# Altium PCB Adafruit BNO055.PcbDoc
Units mil, origin at the board's own origin, x right, y up, seen from the top; angles counter-clockwise.
Board outline 1050 x 800 mil, 2 copper layers (Top, Bottom); 31 components, 16 nets, 89 pads, 15 vias.
Unrouted connection lines stored in the file: 1.
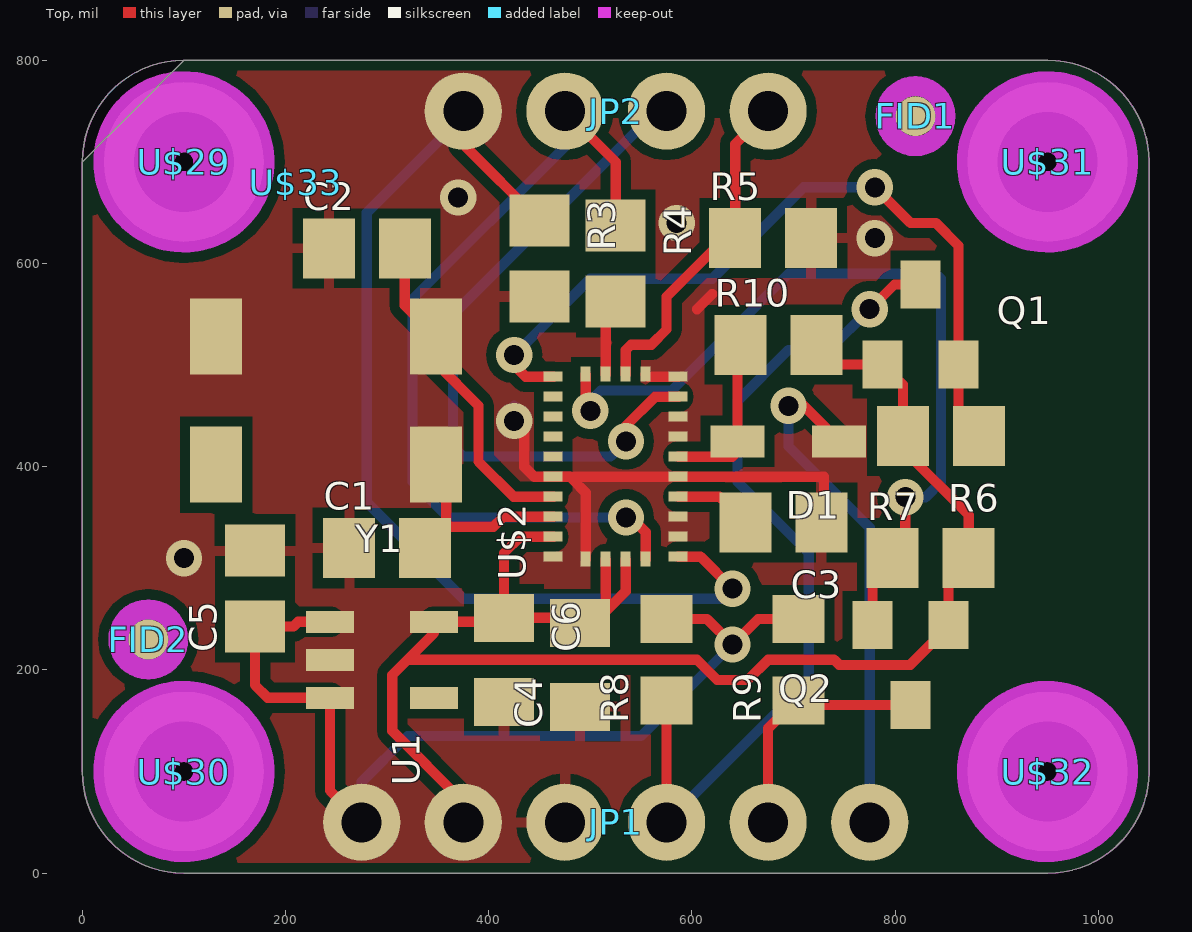
[diagram p0: Top view]
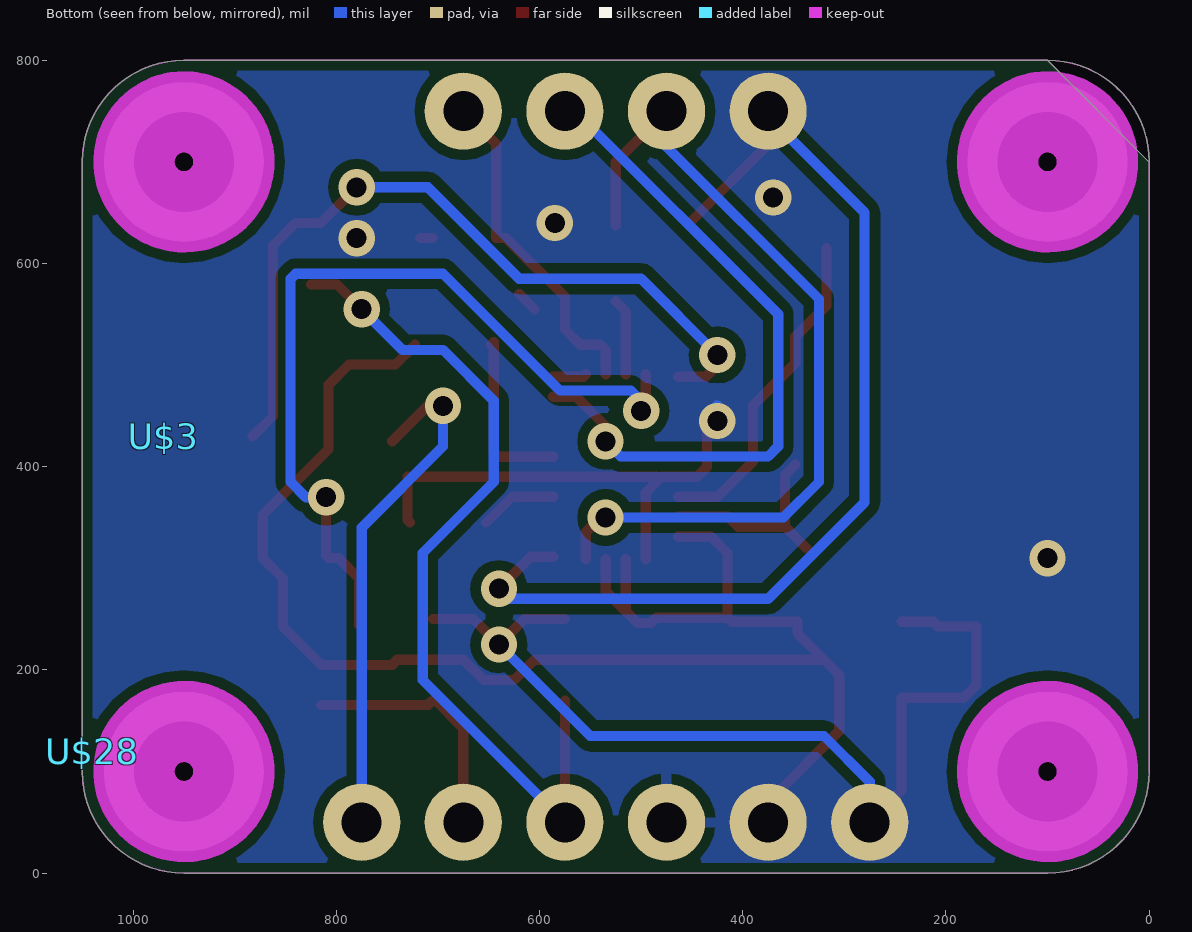
[diagram p1: Bottom view, seen from below]

## Layer stack, top to bottom
Top Solder: solder mask 0.4, Solder Resist, Dk 3.5
Top: signal copper 1.378
Dielectric 1: dielectric 12.6, FR-4, Dk 4.8
Bottom: signal copper 1.378
Bottom Solder: solder mask 0.4, Solder Resist, Dk 3.5

## Board outline
0,700 cw(c100,700) 100,800 950,800 cw(c950,700) 1050,700 1050,100 cw(c950,100) 950,0 100,0 cw(c100,100) 0,100 0,700 cw(c100,700)

## Design rules (kind name [scope] priority, off if disabled: settings)
BoardOutlineClearance mdCopperDimension [All] p1: gap=10 ignorepadtopadclearanceinfootprint=FALSE except(0: Arc-SplitContinuation Track-SplitContinuation SMDPad-SplitContinuation THPad-SplitContinuation Via-SplitContinuation Fill-SplitContinuation Poly-SplitContinuation Region-SplitContinuation Text-SplitContinuation)
Clearance Clearance_for_PolygonClass_Isolate_10 [InPolygonClass('Isolate_10') vs IsArc Or IsTrack Or IsPad Or IsVia Or IsFill Or IsRegion Or IsText] p1: gap=10 ignorepadtopadclearanceinfootprint=FALSE
Clearance "Clearance (Same Net)" [All] p2: gap=8 ignorepadtopadclearanceinfootprint=FALSE
Clearance [All] p3: gap=8 ignorepadtopadclearanceinfootprint=FALSE
HoleSize [All] p1: absolutevalues=TRUE maxlimit=100000 minlimit=15.5 maxpercent=80.000 minpercent=20.000
HoleToHoleClearance mdDrill [All] p1: gap=8 allowstackedmicrovias=TRUE
MinimumSolderMaskSliver [All] p1 off: minsoldermaskwidth=10
PasteMaskExpansion Expansion_SMDPaste_OFF [InPadClass('SMDPaste_OFF')] p1: expansion=0
PasteMaskExpansion mlMinCreamFrame [All] p2: expansion=0
PolygonConnect PolygonConnect_For_PolygonThermal_ON_Width100000_Gap100000 [InPolygonClass('PolygonThermal_ON_Width100000_Gap100000') vs Not IsVia] p1: connectstyle=Relief reliefconductorwidth=10 reliefentries=4 polygonreliefangle="90 Angle" airgapwidth=10
PolygonConnect ThermalVias [IsVia] p2: connectstyle=Direct reliefconductorwidth=10 reliefentries=4 polygonreliefangle="90 Angle" airgapwidth=10
PolygonConnect [All] p3: connectstyle=Relief reliefconductorwidth=10 reliefentries=4 polygonreliefangle="90 Angle" airgapwidth=10
RoutingVias [All] p1: holewidth=15.5 width=31.5 viastyle="Through Hole" minholewidth=15.5 minwidth=31.5 maxholewidth=100 maxwidth=100
SolderMaskExpansion mlMinStopFrame [All] p1: expansion=2 istentingtop=FALSE
Width [All] p1: maxlimit=10000 minlimit=8 preferedwidth=8
26 further rules are at their usual default settings.

## Classes and differential pairs
polygon class PolygonThermal_ON_Width100000_Gap100000: Polygon_1_Net_GND Polygon_2_Net_GND
polygon class Isolate_10: Polygon_1_Net_GND Polygon_2_Net_GND
pad class SMDPaste_OFF: FID1-1 FID2-1

## Components (designator, comment, footprint, x,y, rotation, side; value= is the part's Value field where it differs from the comment)
C1 "22pF" 0805-NO 300,320 r0 top
C2 "22pF" 0805-NO 280,615 r0 top
C3 "0.1uF" 0805-NO 690,345 r180 top
C4 "0.1uF" 0805_10MGAP 490,205 r90 top
C5 "10uF" 0805-NO 170,280 r90 top
C6 "10uF" 0805_10MGAP 415,210 r270 top
D1 "1n4148" SOD-323 695,425 r180 top
FID1 "" FIDUCIAL_1MM 820,745 r0 top
FID2 "" FIDUCIAL_1MM 65,230 r0 top
JP1 "" 1X06_ROUND_76 525,50 r0 top
JP2 "" 1X04_ROUND_76 525,750 r0 top
Q1 "BSS138" SOT23-WIDE 825,540 r0 top
Q2 "BSS138" SOT23-WIDE 815,205 r180 top
R3 "10K" 0805-NO 450,605 r270 top
R4 "10K" 0805-NO 525,600 r270 top
R5 "10K" 0805-NO 680,625 r0 top
R6 "10K" 0805-NO 845,430 r180 top
R7 "10K" 0805-NO 835,310 r0 top
R8 "10K" _0805MP 575,210 r90 top
R9 "10K" _0805MP 705,210 r90 top
R10 "10K" 0805-NO 685,520 r0 top
U1 "MIC5225-3.3" SOT23-5 295,210 r270 top
U$2 "BNO055" BNO055 525,400 r90 top
U$3 "" PCBFEAT-REV-040 970,430 r180 bottom
U$28 "" ADAFRUIT_TEXT_20MM 1040,120 r180 bottom
U$29 "" MOUNTINGHOLE_2.5_PLATED_THICK 100,700 r0 top
U$30 "" MOUNTINGHOLE_2.5_PLATED_THICK 100,100 r0 top
U$31 "" MOUNTINGHOLE_2.5_PLATED_THICK 950,700 r0 top
U$32 "" MOUNTINGHOLE_2.5_PLATED_THICK 950,100 r0 top
U$33 "" ADAFRUIT_2.5MM 210,680 r0 top
Y1 "32.768kHz" CRYSTAL_8X3.8 240,465 r180 top

## Footprints (in the part's own frame and the unit in brackets; to place one, negate y for a bottom-side part, rotate by r counter-clockwise, add the part's x,y. Pads: shape width x height; smd on the part's side, far side on the other; paste and mask are expansions set on the pad)
1X04_ROUND_76 [mil] "1X04_ROUND_76"
  round 76 hole 39.37: 1(-150,0) 2(-50,0) 3(50,0) 4(150,0)
1X06_ROUND_76 [mil] "1X06_ROUND_76"
  round 76 hole 39.37: 1(-250,0) 2(-150,0) 3(-50,0) 4(50,0) 5(150,0) 6(250,0)
0805-NO [mil] "0805-NO"
  rect 51.18x59.06 smd: 1(-37.4,0) 2(37.4,0)
0805_10MGAP [mil] "0805_10MGAP"
  rect 47.24x59.06 smd: 1(-41.34,0) 2(41.34,0)
_0805MP [mil] "_0805MP"
  rect 47.24x51.18 smd: 1(-40,0) 2(40,0)
ADAFRUIT_2.5MM [mil] "ADAFRUIT_2.5MM"
ADAFRUIT_TEXT_20MM [mil] "ADAFRUIT_TEXT_20MM"
BNO055 [mil] "BNO055"
  rect 9.84x18.7 smd: 1(-88.58,61.52) 6(-88.58,-61.52) 7(-68.9,-61.52) 8(-49.21,-61.52) 9(-29.53,-61.52) 10(-9.84,-61.52) 11(9.84,-61.52) 12(29.53,-61.52) 13(49.21,-61.52) 14(68.9,-61.52) 15(88.58,-61.52) 20(88.58,61.52) 21(68.9,61.52) 22(49.21,61.52) 23(29.53,61.52) 24(9.84,61.52) 25(-9.84,61.52) 26(-29.53,61.52) 27(-49.21,61.52) 28(-68.9,61.52)
  rect 14.76x9.84 smd: 2(-91.04,29.53) 3(-91.04,9.84) 4(-91.04,-9.84) 5(-91.04,-29.53) 16(91.04,-29.53) 17(91.04,-9.84) 18(91.04,9.84) 19(91.04,29.53)
CRYSTAL_8X3.8 [mil] "CRYSTAL_8X3.8"
  rect 51.18x74.8 smd: P$1(-108.27,-62.99) P$2(108.27,-62.99) P$3(108.27,62.99) P$4(-108.27,62.99)
FIDUCIAL_1MM [mm] "FIDUCIAL_1MM"
  rrect100% 1x1 smd paste+0: 1(0,0)
  Top keep-out lines w0.5: -0.75,0 ccw(c0,0) 0,-0.75 ; -0.75,0 cw(c0,0) 0,0.75 ; -0.75,0 ccw(c0,0) 0,-0.75 ; -0.75,0 cw(c0,0) 0,0.75 ; 0,-0.75 ccw(c0,0) 0.75,0 ; 0,-0.75 ccw(c0,0) 0.75,0 ; 0,0.75 cw(c0,0) 0.75,0 ; 0,0.75 cw(c0,0) 0.75,0
MOUNTINGHOLE_2.5_PLATED_THICK [mm] "MOUNTINGHOLE_2.5_PLATED_THICK"
  round 4 hole 2.5: P$1(0,0)
  Top keep-out circle w2.032: c0,0 r1.25
  Top keep-out circle w2.032: c0,0 r1.25
  Bottom keep-out circle w2.032: c0,0 r1.25
  Bottom keep-out circle w2.032: c0,0 r1.25
PCBFEAT-REV-040 [mil] "PCBFEAT-REV-040"
SOD-323 [mil] "SOD-323"
  rect 53.15x31.5 smd: A(50,0) C(-50,0)
SOT23-5 [mil] "SOT23-5"
  rect 21.65x47.24 smd: 1(-37.4,-51.19) 2(0,-51.19) 3(37.4,-51.19) 4(37.4,51.19) 5(-37.4,51.19)
SOT23-WIDE [mm] "SOT23-WIDE"
  rect 1x1.2 smd: 1(-0.95,-1) 2(0.95,-1) 3(0,1)

## Part data
C1 C2 C3 C5 R3 R4 R5 R6 R7 R10: library part 0805-NO, PackageName=0805-NO
C4 C6: library part 0805_10MGAP, PackageName=0805_10MGAP
D1: library part SOD-323, PackageName=SOD-323
FID1 FID2: library part FIDUCIAL_1MM, PackageName=FIDUCIAL_1MM
JP1: library part 1X06_ROUND_76, PackageName=1X06_ROUND_76
JP2: library part 1X04_ROUND_76, PackageName=1X04_ROUND_76
Q1 Q2: library part SOT23-WIDE, PackageName=SOT23-WIDE
R8 R9: library part _0805MP, PackageName=_0805MP
U1: library part SOT23-5, PackageName=SOT23-5
U$3: library part PCBFEAT-REV-040, PackageName=PCBFEAT-REV-040
U$28: library part ADAFRUIT_TEXT_20MM, PackageName=ADAFRUIT_TEXT_20MM
U$29 U$30 U$31 U$32: library part MOUNTINGHOLE_2.5_PLATED_THICK, PackageName=MOUNTINGHOLE_2.5_PLATED_THICK
U$33: library part ADAFRUIT_2.5MM, PackageName=ADAFRUIT_2.5MM
Y1: library part CRYSTAL_8X3.8, PackageName=CRYSTAL_8X3.8
U$2: PackageName=BNO055

## Via types
v1: diameter 35.69/35.69 (per signal layer), hole 19.69, Top to Bottom, 15 vias

## Nets (pads, with @x,y where several pads share a name; then routed paths per layer and width w, separated by ;. In a path a pad name is that pad's centre, name@x,y a point inside that pad or via, vN(x,y) a via of type N, cw(c..) or ccw(c..) an arc to the next point about the centre after c; other vN are vias at no path point)
3.3V: C4.2 C6.1 JP1.2 Q1.1 Q2.1 R6.2 R7.2 R10.2 U1.5 U$2.3 U$2.4 U$2.28 | length 1598.7
  Top w10: JP1.2 375,70 305,140 305,195 320,210 ; U$2.28 431.1,331.1 415,315 C6.1 ; U$2.3 C4.2@515.16,257.72 ; U$2.4 534.84,277.4 C4.2@515.16,257.72 ; R10.2 741.77,500.63 Q1.1 807.6,480.63 R6.2 807.6,417.4 872.4,352.6 R7.2 ; R7.2@867.4,305 R7.2 ; 320,210 605,210 625,190 655,190 675,210 740,210 745,205 815,205 852.4,242.4 Q2.1 852.4,290 R7.2 ; 320,210 346.19,236.19 U1.5 411.06,247.4 C6.1 ; C6.1 485,251.34 C4.2 503.78,246.34 C4.2@515.16,257.72
5.0V: C5.1 JP1.1 R8.2 R9.2 U1.1 U1.3 | length 959.5
  Top w10: U1.1 212.4,247.4 207.6,242.6 C5.1 170,185 182.4,172.6 U1.3 243.82,81.19 JP1.1 ; R8.2 615,250 v1(640,225) 665,250 R9.2
  Bottom w10: JP1.1 275,90 320,135 550,135 v1(640,225)
GND: C1.1 C2.1 C3.1 C4.1 C5.2 C6.2 JP1.3 R3.2 R4.2 R5.2 U1.2 U$2.2 U$2.10 U$2.15 U$2.16 U$2.18 U$2.25 | length 620.7
  Top w10: v1@435,440 435,400 444.84,390.16 U$2.25 479.84,390.16 482.5,387.5 ; U$2.2 495.47,374.53 482.5,387.5 ; U$2.18 515.16,552.76 R4.2 ; U$2.16 556.99,488.58 U$2.15 ; 605,555 620,570 ; R5.2@705,625 R5.2 ; C3.1 730,347.6 730,390 729.84,390.16 U$2.10 485.16,390.16 482.5,387.5
  Bottom w10: v1@425,460 v1@430,455
  other v1: 100,310 425,445 780,625 585,640 370,665
I2CADDR_3V: JP2.4 R5.1 U$2.17 | length 334.6
  Top w10: U$2.17 534.84,514.84 540,520 560,520 575,535 575,567.4 632.6,625 R5.1 642.6,717.6 JP2.4
INT_3V: JP2.3 U$2.14 | length 681.7
  Top w10: v1(535,425) 535,440 563.9,468.9 U$2.14
  Bottom w10: v1(535,425) 520,410 375,410 365,420 365,550 565,750 JP2.3
N$1: C1.2 U$2.27 Y1.P$4 | length 204.1
  Top w10: C1.2 C1.2@358.27,340.87 ; Y1.P$4 358.27,392.01 C1.2@358.27,340.87 ; U$2.27 414.49,350.79 404.57,340.87 C1.2@358.27,340.87
N$2: C2.2 U$2.26 Y1.P$1 | length 327.9
  Top w10: C2.2 317.4,558.86 Y1.P$1 348.27,501.73 390,460 390,405 424.53,370.47 U$2.26
N$3: C3.2 U$2.9 | length 76.6
  Top w10: U$2.9 627.13,370.47 C3.2
NRESET_3V: D1.A R10.1 U$2.11 | length 171.9
  Top w10: U$2.11 639.84,409.84 645,415 D1.A 645,522.6 R10.1
PS0_3V: JP2.1 R3.1 U$2.6 | length 1033
  Top w10: JP2.1 375,717.4 R3.1 ; U$2.6 608.58,311.42 v1(640,280)
  Bottom w10: JP2.1 375,745 280,650 280,365 375,270 630,270 v1(640,280)
PS1_3V: JP2.2 R4.1 U$2.5 | length 837
  Top w10: JP2.2 525,700 R4.1 ; v1(535,350) 540,350 554.53,335.47 U$2.5
  Bottom w10: JP2.2 475,715 325,565 325,385 360,350 v1(535,350)
RST_5V: D1.C JP1.6 | length 507.6
  Top w10: v1(695,460) 710,460 D1.C
  Bottom w10: v1(695,460) 695,420 775,340 JP1.6
SCL_3V: Q2.2 R7.1 U$2.19 | length 832.8
  Top w10: U$2.19 495.47,459.53 v1(500,455) ; Q2.2 777.6,290 R7.1 807.4,310 810,312.6 v1(810,370)
  Bottom w10: v1(500,455) 500,465 510,475 580,475 695,590 840,590 845,585 845,385 830,370 v1(810,370)
SCL_5V: JP1.5 Q2.3 R9.1 | length 245.8
  Top w10: JP1.5 675,142.6 702.4,170 R9.1 709.37,165.63 Q2.3
SDA_3V: Q1.2 R6.1 U$2.20 | length 778.6
  Top w10: v1(425,510) 425,500 436.42,488.58 U$2.20 ; v1(780,675) 815,640 840,640 862.4,617.6 Q1.2 862.4,450 R6.1
  Bottom w10: v1(425,510) 500,585 620,585 710,675 v1(780,675)
SDA_5V: JP1.4 Q1.3 R8.1 | length 849.4
  Top w10: JP1.4 R8.1 ; v1(775,555) 799.37,579.37 Q1.3
  Bottom w10: JP1.4 715,190 715,315 645,385 645,465 695,515 735,515 v1(775,555)
pads on no net: FID1.1 FID2.1 U1.4 U$2.1 U$2.7 U$2.8 U$2.12 U$2.13 U$2.21 U$2.22 U$2.23 U$2.24 U$29.P$1 U$30.P$1 U$31.P$1 U$32.P$1 Y1.P$2 Y1.P$3

## Polygon pours and split planes (outlines as drawn)
GND on Bottom "Polygon_1_Net_GND" (solid, remove dead copper, pour order 1): -5,805 1055,805 1055,-5 -5,-5
GND on Top "Polygon_2_Net_GND" (solid, remove dead copper, pour order 0): -5,805 1055,805 1055,-5 -5,-5

## Keep-outs
Keep-Out Layer:
  the board outline again, w0

## Silkscreen, mask and mechanical layers (free items; w line width, h text height)
Dimension:
  the board outline again, w0
tPlace:
  text "INT" at 543.77,675.03 h27.2
  text "PS0" at 335.28,673.14 h27.2
  text "PS1" at 439.81,673.14 h27.2
  text "ADR" at 640.83,673.14 h27.2
  text "BNO055" at 67.68,300.39 h42.5 r90
  text "Orientation" at 961.07,235.97 h34 r90
  text "9-Axis Abs." at 1021.07,235.97 h34 r90
  text "Vin" at 241.25,98.14 h27.2
  text "3vo" at 336.35,98.14 h27.2
  text "GND" at 440.28,98.14 h27.2
  text "SDA" at 540.28,98.14 h27.2
  text "SCL" at 640.28,98.14 h27.2
  text "RST" at 741.86,98.14 h27.2
bPlace:
  text "BNO055" at 715.53,620.5 h47.6
  text "Vin:3-5V DC, 3V logic" at 975,558.93 h34
  text "SDA/SCL/RST: 5V ok" at 975,498.93 h34
  text "3-Axis Accel+Gyro+Mag" at 755,428.93 h34
  text "w/Quaternion, Euler" at 755,368.93 h34
  text "Heading, etc. I2C Out" at 755,308.93 h34

## Dimensions
525,50 to 525,750 on tFinish
100,100 to 100,700 on tFinish
215,0 to 230,800 on tFinish
100,700 to 950,700 on tFinish
0,555 to 1050,450 on tFinish

## Text inside footprints (layer, text, board x,y; h text height)
U$3: tPlace ">REV" at 984,410 h34